# Altium PCB The-SIPM-(2).pcbdoc
Units mil, origin at the board's own origin, x right, y up, seen from the top; angles counter-clockwise.
Board outline 4760 x 4660 mil, 2 copper layers (Top Layer, Bottom Layer); 119 components, 59 nets, 365 pads, 107 vias.
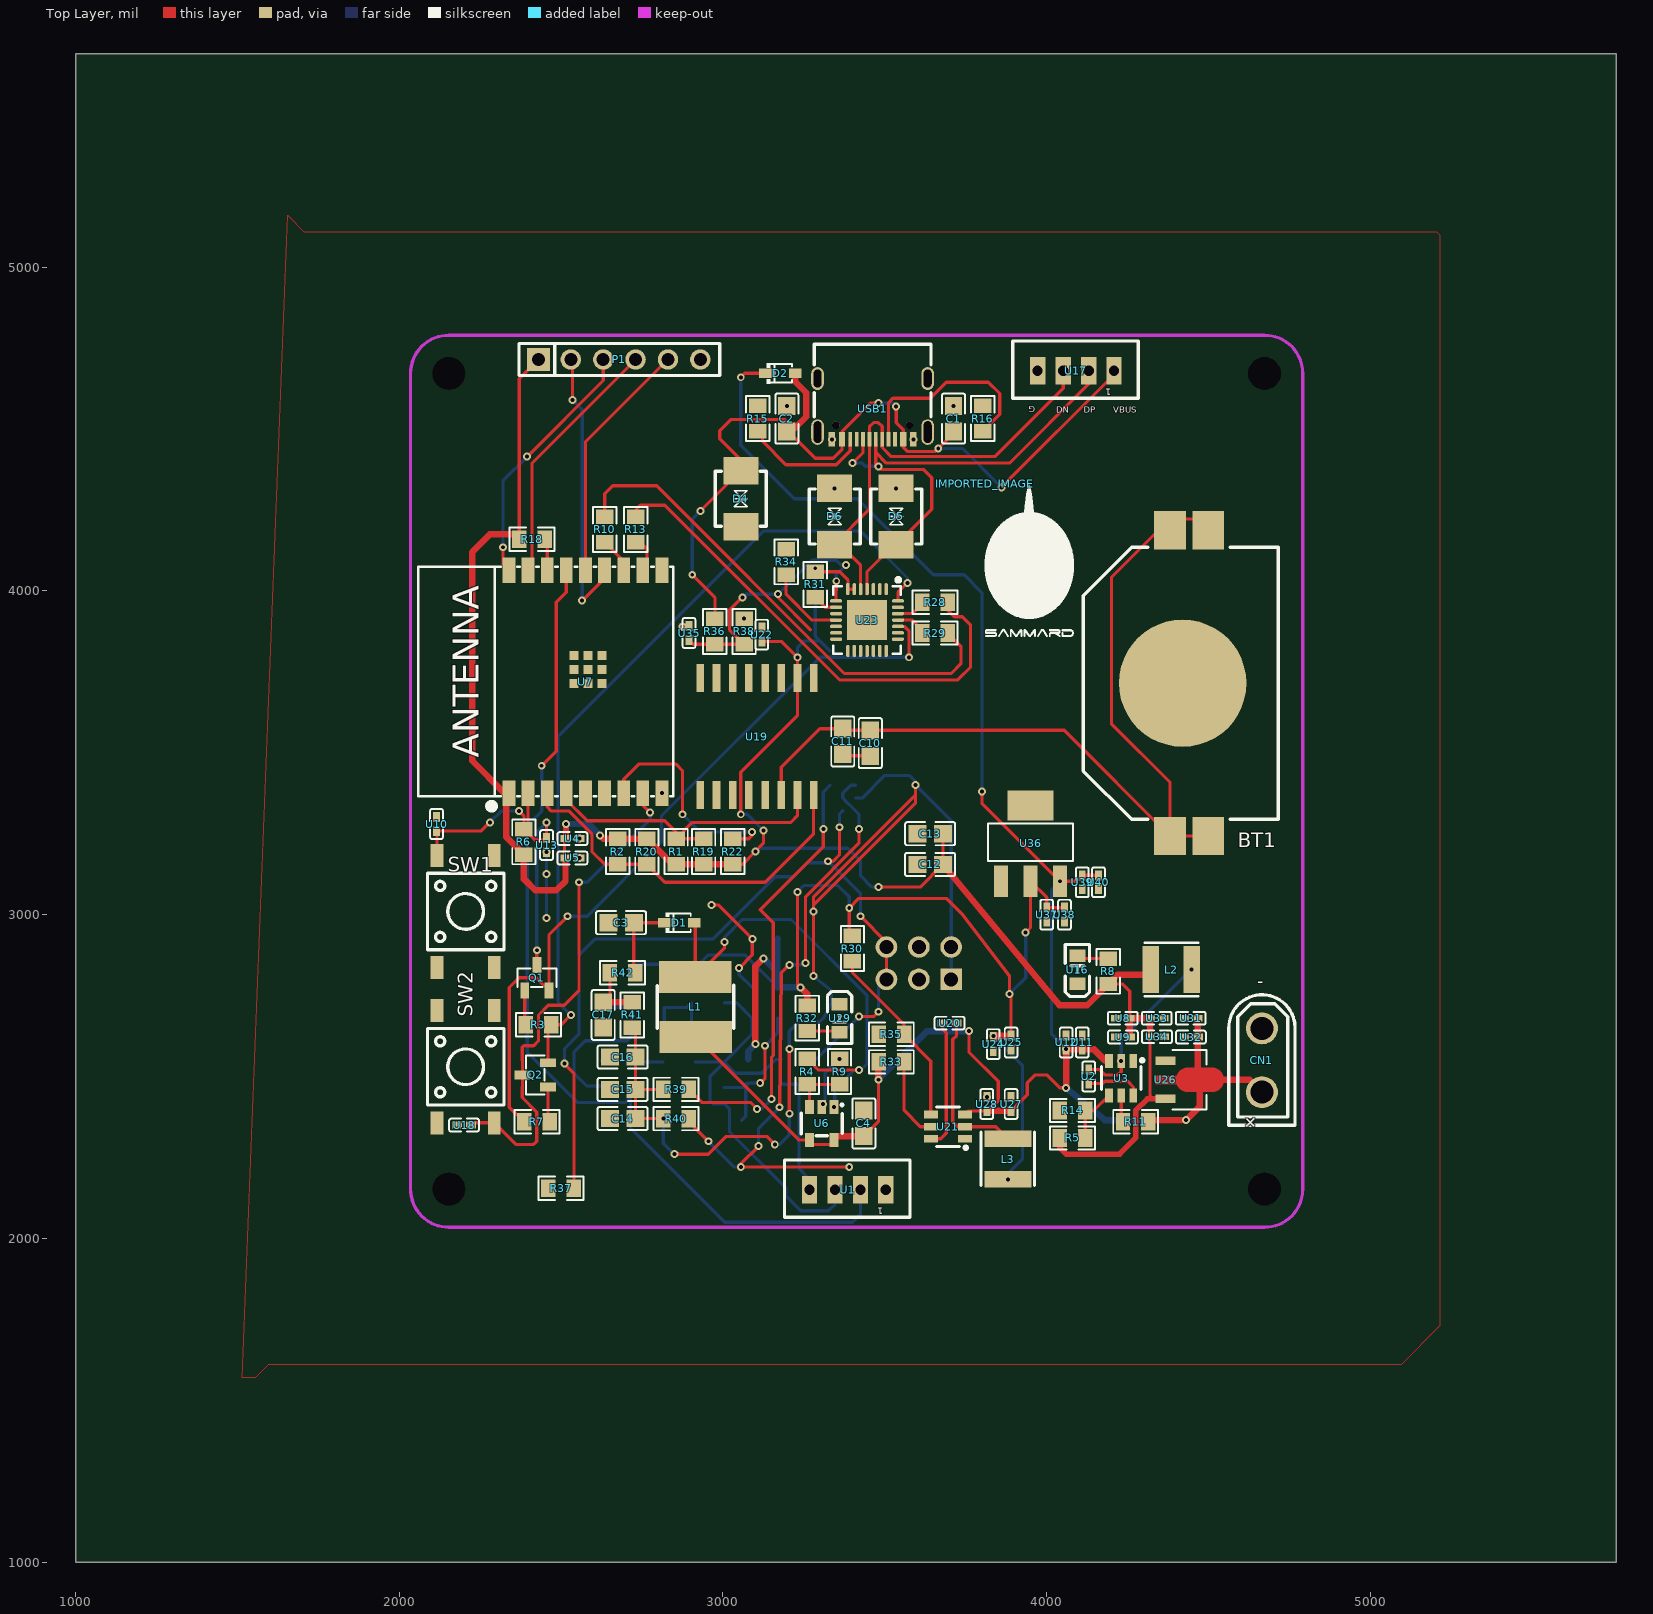
[diagram p0: Top Layer view]
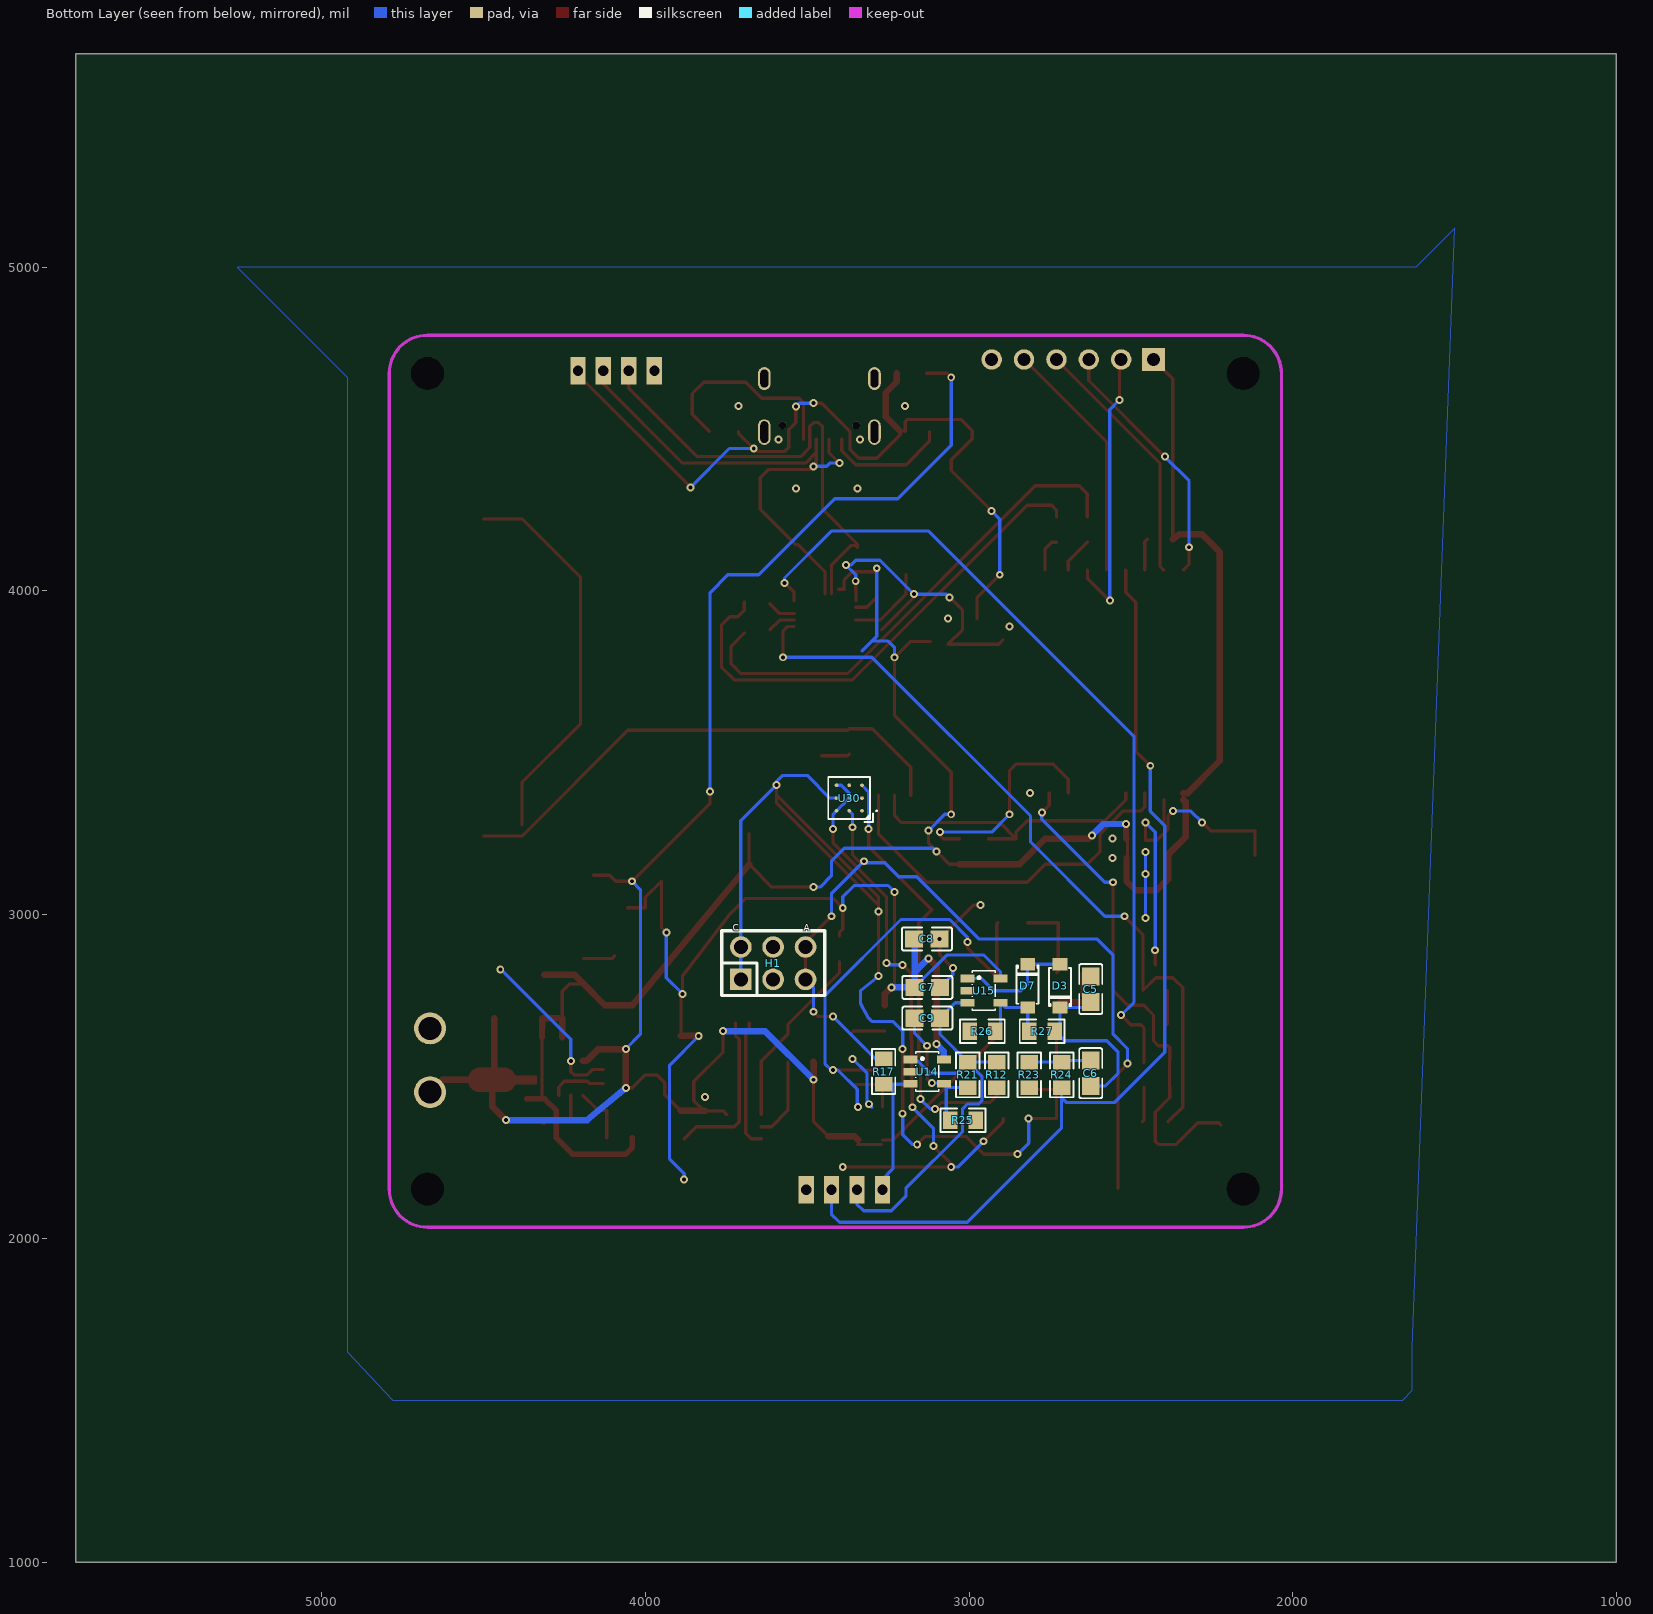
[diagram p1: Bottom Layer view, seen from below]

## Layer stack, top to bottom
Top Layer: signal copper (thickness not stored)
Dielectric: dielectric 12.6, FR-4, Dk 4.8
Bottom Layer: signal copper (thickness not stored)

## Board outline
5760,1000 1000,1000 1000,5660 5760,5660
cut-out: 2102.84,4671.89 cw(c2153.11,4672.16) 2203.39,4671.89 cw(c2153.11,4671.62) 2102.84,4671.89
cut-out: 2102.84,2152.21 cw(c2153.11,2152.48) 2203.39,2152.21 cw(c2153.11,2151.94) 2102.84,2152.21
cut-out: 4622.51,2152.21 cw(c4672.79,2152.48) 4723.06,2152.21 cw(c4672.79,2151.94) 4622.51,2152.21
cut-out: 4622.51,4671.89 cw(c4672.79,4672.16) 4723.06,4671.89 cw(c4672.79,4671.62) 4622.51,4671.89

## Components (designator, comment, footprint, x,y, rotation, side; value= is the part's Value field where it differs from the comment)
BT1 "CR2032" BAT-SMD_CR2032 4440,3715 r270 top
C1 "0.1uF" C0805#1 3712.25,4532.25 r90 top
C2 "10uF" C0805#1 3197.25,4532.25 r90 top
C3 "4.7uF" C0805#1 2685,2975 r180 top
C4 "2.2uF" C0805#1 3435,2355 r90 top
C5 "20nF" C0805#2 2623.89,2770.14 r270 bottom
C6 "20nF" C0805#2 2623.89,2510.14 r270 bottom
C7 "0.1uF" C0805#2 3128.89,2775.14 r0 bottom
C8 "10uF" C0805#2 3130,2925 r0 bottom
C9 "20nF" C0805#2 3128.89,2680.14 r0 bottom
C10 "0.1uF" C0805#1 3455,3530 r270 top
C11 "10uF" C0805#1 3370,3535 r270 top
C12 "0.1uF" C0805#1 3640,3155 r180 top
C13 "10uF" C0805#1 3640,3250 r180 top
C14 "0.1uF" C0805#1 2690,2370 r180 top
C15 "1uF" C0805#1 2690,2460 r180 top
C16 "10uF" C0805#1 2690,2560 r180 top
C17 "1uF" C0805#1 2630,2690 r270 top
CN1 "XT30UPB-M" CONN-TH_XT30UPB-M 4665,2550 r270 top
D1 "1N5819WS" SOD-323_L1.8-W1.3-LS2.5-RD 2865,2975 r0 top
D2 "LBAT54HT1G" SOD-323_L1.8-W1.3-LS2.5-RD 3177.25,4672.25 r0 top
D3 "1N5817W" SOD-123_L2.8-W1.8-LS3.7-RD 2718.89,2780.14 r270 bottom
D4 "SMBJ7.5CA-QH" DO-214AA_L4.4-W3.6-LS5.3-BI 3055,4285 r270 top
D5 "SMBJ7.5CA-QH" DO-214AA_L4.4-W3.6-LS5.3-BI 3535,4230 r90 top
D6 "SMBJ7.5CA-QH" DO-214AA_L4.4-W3.6-LS5.3-BI 3345,4230 r90 top
D7 "1N5817W" SOD-123_L2.8-W1.8-LS3.7-RD 2818.89,2780.14 r90 bottom
H1 "2×(4-1) Double female header" HDR-TH_6P-P2.54-V-F-R2-C3-S2.54-1 3605,2850 r0 bottom
IMPORTED_IMAGE "IMPORTED_IMAGE" IMPORTED_IMAGE 3808.43,4330.53 r0 top
L1 "10uH" IND-SMD_L6.0-W6.0_FNR60XXS 2915,2715 r270 top
L2 "2.2uH" IND-SMD_L4.0-W4.0_SMNR4012 4385,2830 r0 top
L3 "3.3uH" IND-SMD_L4.0-W4.0_SMNR4012 3880,2245 r90 top
P1 "SD card Reader" HDR-TH_6P-P2.54-V-F 2680,4715 r0 top
Q1 "L8050QLT1G" SOT-23-3_L2.9-W1.3-P1.90-LS2.4-BR 2425,2805 r270 top
Q2 "L8050QLT1G" SOT-23-3_L2.9-W1.3-P1.90-LS2.4-BR 2420,2505 r0 top
R1 "10k" R0805#1 2855,3195 r270 top
R2 "10k" R0805#1 2675,3195 r90 top
R3 "10K" R0805#1 2430,2660 r180 top
R4 "2k" R0805#1 3260,2515 r90 top
R5 "33.2k" R0805#1 4080,2310 r0 top
R6 "10K" R0805#1 2385,3225 r90 top
R7 "10K" R0805#1 2425,2360 r0 top
R8 "1k" R0805#1 4190,2825 r270 top
R9 "51k" R0805#1 3360,2515 r270 top
R10 "499" R0805#1 2635,4190 r90 top
R11 "10k" R0805#1 4275,2360 r0 top
R12 "0805" R0805#2 2913.89,2505.14 r90 bottom
R13 "499" R0805#1 2730,4190 r90 top
R14 "10k" R0805#1 4080,2395 r0 top
R15 "5.1k" R0805#1 3107.25,4532.25 r90 top
R16 "5.1k" R0805#1 3802.25,4532.25 r270 top
R17 "0805" R0805#2 3263.89,2515.14 r90 bottom
R18 "10k" R0805#1 2410,4160 r0 top
R19 "10K" R0805#1 2940,3195 r90 top
R20 "10K" R0805#1 2765,3195 r270 top
R21 "0805" R0805#2 3003.89,2505.14 r270 bottom
R22 "10k" R0805#1 3030,3195 r90 top
R23 "0805" R0805#2 2813.89,2505.14 r270 bottom
R24 "0805" R0805#2 2713.89,2505.14 r270 bottom
R25 "0805" R0805#2 3018.89,2365.14 r0 bottom
R26 "0805" R0805#2 2958.89,2640.14 r180 bottom
R27 "0805" R0805#2 2773.89,2640.14 r180 bottom
R28 "0Ω" R0805#1 3655,3965 r0 top
R29 "0Ω" R0805#1 3655,3870 r0 top
R30 "54.9k" R0805#1 3400,2895 r270 top
R31 "1k" R0805#1 3285,4020 r270 top
R32 "1k" R0805#1 3260,2680 r90 top
R33 "10k" R0805#1 3520,2545 r180 top
R34 "10k" R0805#1 3195,4090 r270 top
R35 "10k" R0805#1 3520,2630 r0 top
R36 "22.1K" R0805#1 2975,3875 r270 top
R37 "0805" R0805#1 2500,2155 r0 top
R38 "47.5K" R0805#1 3065,3875 r90 top
R39 "0Ω" R0805#1 2855,2460 r180 top
R40 "0Ω" R0805#1 2855,2370 r180 top
R41 "0805" R0805#1 2720,2690 r90 top
R42 "0805" R0805#1 2690,2820 r0 top
SW1 "SMD Tactile Switch6*6*6mm" SW-SMD_4P-L6.0-W6.0-P4.50-LS9.0_C23873 2205,3009.99 r270 top
SW2 "SMD Tactile Switch6*6*6mm" SW-SMD_4P-L6.0-W6.0-P4.50-LS9.0_C23873 2205,2529.99 r90 top
U1 "JST-PH_4-PIN_HEADER" JST_B4B-PH_HEADER 3385,2150 r0 top
U2 "0.1uF" C0402 4130,2500 r90 top
U3 "TPS563201DDCR" SOT-23-6_L2.9-W1.6-P0.95-LS2.8-BR 4230,2495 r90 top
U4 "10uF" C0402 2535,3235 r0 top
U5 "0.1uF" C0402 2535,3175 r0 top
U6 "MIC2288YD5-TR" TSOT-23-5_L2.9-W1.6-P0.95-LS2.8-BR 3305,2355 r90 top
U7 "ESP32-C3-WROOM-02-N4(4MB)" BULETM-SMD_ESPRESSIF_ESP32-C3-WROOM-02-N4-4MB 2575,3720 r90 top
U8 "22uF" C0402 4235,2680 r180 top
U9 "22uF" C0402 4235.59,2621.9 r180 top
U10 "0.1uF" C0402 2115,3280 r270 top
U11 "10uF" C0402 4110,2605 r90 top
U12 "1uF" C0402 4060,2605 r90 top
U13 "1uF" C0402 2455,3215 r270 top
U14 "OPA356AIDBVR" SOT-23-5_L3.0-W1.7-P0.95-LS2.8-BR 3128.89,2515.14 r180 bottom
U15 "OPA356AIDBVR" SOT-23-5_L3.0-W1.7-P0.95-LS2.8-BR 2953.89,2765.14 r180 bottom
U16 "0805 SF-RED" LED0805-RD_RED 4095,2830 r90 top
U17 "JST-PH_4-PIN_HEADER" JST_B4B-PH_HEADER 4090,4680 r0 top
U18 "0.1uF" C0402 2200,2350 r0 top
U19 "DS3231" SO16W 3105,3550 r180 top
U20 "0.1uF" C0402 3700,2665 r0 top
U21 "TPS563201DDCR" SOT-23-6_L2.9-W1.6-P0.95-LS2.8-BR 3695,2345 r0 top
U22 "10uF" C0402 3120,3865 r90 top
U23 "CP2102" QFN-28_L5.0-W5.0-P0.50-TL-EP3.2 3445,3910 r270 top
U24 "22uF" C0402 3835,2600 r270 top
U25 "22uF" C0402 3890,2605 r270 top
U26 "HT7833" SOT-89_L4.5-W2.5-P1.50-LS4.2-BR 4420,2490 r180 top
U27 "0.1uF" C0402 3890,2415 r90 top
U28 "10uF" C0402 3815,2415 r90 top
U29 "0805 SF-RED" LED0805-RD_RED 3360,2680 r270 top
U30 "Sipm2" SIPM_REVERSE 3370,3360 r270 bottom
U31 "10uF" C0402 4445,2680 r180 top
U32 "0.1uF" C0402 4445.59,2621.9 r180 top
U33 "10uF" C0402 4340,2680 r0 top
U34 "0.1uF" C0402 4340.59,2622.67 r0 top
U35 "1uF" C0402 2895,3870 r90 top
U36 "AMS117-5V" AMS117-TOPL 3950,3220 r90 top
U37 "0.1uF" C0402 4000,3000 r270 top
U38 "10uF" C0402 4055,3000 r270 top
U39 "10uF" C0402 4110,3100 r270 top
U40 "0.1uF" C0402 4160,3100 r270 top
USB1 "HX TYPE-C 16P 3MD 5A" TYPE-C-SMD_HX-TYPE-C-16P-3MD-5A 3462.25,4562.25 r180 top

## Footprints (in the part's own frame and the unit in brackets; to place one, negate y for a bottom-side part, rotate by r counter-clockwise, add the part's x,y. Pads: shape width x height; smd on the part's side, far side on the other; paste and mask are expansions set on the pad)
AMS117-TOPL [mm]
  rect 2.5x1.1 smd paste+0 mask+0.051: 1(-2.97,2.3) 2(-2.97,0) 3(-2.97,-2.3)
  rect 2.34x3.6 smd paste+0 mask+0.051: 4(2.97,0)
  silkscreen extent -1.37,-3.33 1.57,3.33
BAT-SMD_CR2032 [mm]
  round 10 smd paste-100 mask+0.05: 1(0,-0.508)
  rect 3x2.5 smd paste-100 mask+0.05: 2(-12,-1.5) 2(-12,1.5) 2(12,-1.5) 2(12,1.5)
  silkscreen extent -10.68,-8.3 10.68,7
BULETM-SMD_ESPRESSIF_ESP32-C3-WROOM-02-N4-4MB [mm]
  rect 2x1 smd paste+0 mask+0.05: 1(-8.75,6) 2(-8.75,4.5) 3(-8.75,3) 4(-8.75,1.5) 5(-8.75,0) 6(-8.75,-1.5) 7(-8.75,-3) 8(-8.75,-4.5) 9(-8.75,-6) 10(8.75,-6) 11(8.75,-4.5) 12(8.75,-3) 13(8.75,-1.5) 14(8.75,0) 15(8.75,1.5) 16(8.75,3) 17(8.75,4.5) 18(8.75,6)
  rect 0.7x0.7 smd paste+0 mask+0.05: 19(-0.14,0.9) 19(-0.14,-0.2) 19(-0.14,-1.3) 19(0.96,-1.3) 19(0.96,-0.2) 19(0.96,0.9) 19(2.06,-1.3) 19(2.06,-0.2) 19(2.06,0.9)
  silkscreen extent -10.03,-6.9 9,13.1
C0402 [mm]
  rect 0.79x0.54 smd paste-100 mask+0.051: 1(-0.545,0) 2(0.545,0)
  silkscreen extent -1.17,-0.5 1.17,0.5
C0805#1 [mm]
  rect 1.41x1.35 smd paste-100 mask+0.051: 1(-1,0) 2(1,0)
  silkscreen extent -1.96,-0.9 1.96,0.9
C0805#2 [mm]
  rect 1.41x1.35 smd paste-100 mask+0.051: 1(1,0) 2(-1,0)
  silkscreen extent -1.96,-0.9 1.96,0.9
CONN-TH_XT30UPB-M [mm]
  round 2.5 hole 1.8 paste+0 mask+0.051: 1(-2.5,0) 2(2.5,0)
  silkscreen extent -5.14,-2.6 5.1,2.6
DO-214AA_L4.4-W3.6-LS5.3-BI [mil]
  rect 85x108 smd paste+0 mask+2: 1(-87,0) 2(87,0)
  silkscreen extent -85,-79 85,79
HDR-TH_6P-P2.54-V-F [mm]
  rect 1.8x1.8 hole 1.02 paste+0 mask+0.051: 1(-6.35,0)
  round 1.6 hole 1.02 paste+0 mask+0.051: 2(-3.81,0) 3(-1.27,0) 4(1.27,0) 5(3.81,0) 6(6.35,0)
  silkscreen extent -7.87,-1.25 7.87,1.25
HDR-TH_6P-P2.54-V-F-R2-C3-S2.54-1 [mm]
  rect 1.7x1.7 hole 1.1 paste+0 mask+0.051: 1(2.54,1.27)
  round 1.7 hole 1.1 paste+0 mask+0.051: 2(2.54,-1.27) 3(0,1.27) 4(0,-1.27) 5(-2.54,1.27) 6(-2.54,-1.27)
  silkscreen extent -4.04,-2.54 4.04,2.54
IMPORTED_IMAGE [mil]
  silkscreen extent 0,-472 276,0
IND-SMD_L4.0-W4.0_SMNR4012 [mm]
  rect 1.3x3.7 smd paste+0 mask+0.051: 1(-1.6,0) 2(1.6,0)
  silkscreen extent -2.08,-2.09 2.12,2.11
IND-SMD_L6.0-W6.0_FNR60XXS [mm]
  rect 2.5x5.7 smd paste+0 mask+0.051: 1(-2.35,-0.013) 2(2.35,0.013)
  silkscreen extent -1.69,-3 1.69,3
JST_B4B-PH_HEADER [mil]
  rect 47.2x85 hole 31.4 paste+0 mask+2: P1(118,0) P2(40,0) P3(-39,0) P4(-118,0)
  silkscreen extent -195,-85 193,92
LED0805-RD_RED [mm]
  rect 1x1.25 smd paste+0 mask+0.051: 1(-1.1,0) 2(1.1,0)
  silkscreen extent -2.1,-0.95 1.98,0.96
QFN-28_L5.0-W5.0-P0.50-TL-EP3.2 [mm]
  oval 0.95x0.28 smd paste-100 mask+0.051: 1(-2.425,1.501) 2(-2.425,1.001) 3(-2.425,0.501) 4(-2.425,0) 5(-2.425,-0.5) 6(-2.425,-1.001) 7(-2.425,-1.501) 15(2.425,-1.501) 16(2.425,-1.001) 17(2.425,-0.5) 18(2.425,0) 19(2.425,0.501) 20(2.425,1.001) 21(2.425,1.501)
  oval 0.28x0.95 smd paste-100 mask+0.051: 8(-1.501,-2.425) 9(-1.001,-2.425) 10(-0.501,-2.425) 11(0,-2.425) 12(0.5,-2.425) 13(1.001,-2.425) 14(1.501,-2.425) 22(1.501,2.425) 23(1.001,2.425) 24(0.5,2.425) 25(0,2.425) 26(-0.501,2.425) 27(-1.001,2.425) 28(-1.501,2.425)
  rect 3.15x3.15 smd paste-100 mask+0.051: 29(0,0)
  silkscreen extent -3.3,-2.65 2.65,2.65
R0805#1 [mil]
  rect 44.59x54.21 smd paste-3937.01 mask+2: 1(-39.37,0) 2(39.37,0)
  silkscreen extent -69,-36 69,36
R0805#2 [mil]
  rect 44.59x54.21 smd paste-3937.01 mask+2: 1(39.37,0) 2(-39.37,0)
  silkscreen extent -69,-36 69,36
SIPM_REVERSE [mm]
  round 0.288 smd paste-100 mask+0.051: A1(-1,0) A2(1,0) C1(0,-1) C2(0,1) R1(-1,1) R2(1,1) ""(-1,-1) ""(0,0) ""(1,-1)
  silkscreen extent -1.65,-1.65 1.87,2.2
SO16W [mil]
  rect 23.6x86.6 smd paste+0 mask+2: 1(-175,-181) 2(-125,-181) 3(-75,-181) 4(-25,-181) 5(25,-181) 6(75,-181) 7(125,-181) 8(175,-181) 9(175,181) 10(125,181) 11(75,181) 12(25,181) 13(-25,181) 14(-75,181) 15(-125,181) 16(-175,181)
SOD-123_L2.8-W1.8-LS3.7-RD [mm]
  rect 0.95x1.15 smd paste+0 mask+0.051: 1(1.693,0) 2(-1.693,0)
  silkscreen extent -1.41,-0.87 1.58,0.87
SOD-323_L1.8-W1.3-LS2.5-RD [mm]
  rect 1x0.75 smd paste+0 mask+0.051: 1(-1.173,0) 2(1.173,0)
  silkscreen extent -1.08,-0.8 0.9,0.8
SOT-23-3_L2.9-W1.3-P1.90-LS2.4-BR [mm]
  rect 1.25x0.7 smd paste+0 mask+0.051: 1(1,-0.95) 2(1,0.95) 3(-1,0)
  silkscreen extent -0.73,-1.53 0.73,1.53
SOT-23-5_L3.0-W1.7-P0.95-LS2.8-BR [mm]
  rect 1.1x0.6 smd paste+0 mask+0.051: 1(-1.3,0.95) 2(-1.3,0) 3(-1.3,-0.95) 4(1.3,-0.95) 5(1.3,0.95)
  silkscreen extent -0.9,-1.55 0.9,1.55
SOT-23-6_L2.9-W1.6-P0.95-LS2.8-BR [mm]
  rect 1.1x0.6 smd paste+0 mask+0.051: 1(1.35,-0.95) 2(1.35,0) 3(1.35,0.95) 4(-1.35,0.95) 5(-1.35,0) 6(-1.35,-0.95)
  silkscreen extent -0.9,-1.78 1.52,1.55
SOT-89_L4.5-W2.5-P1.50-LS4.2-BR [mm]
  rect 1.575x0.672 smd paste+0 mask+0.051: 1(1.356,-1.5) 3(1.356,1.5)
  Top Layer region: -2.283,0.959 -0.429,0.959 -0.385,0.958 -0.34,0.955 -0.296,0.949 -0.252,0.942 -0.208,0.933 -0.165,0.921 -0.123,0.908 -0.081,0.893 -0.04,0.875 0,0.856 0.04,0.835 0.078,0.812 0.115,0.788 0.151,0.761 0.185,0.733 0.219,0.704 0.251,0.673 0.281,0.64 0.31,0.606 0.337,0.571 0.362,0.534 0.386,0.497 0.408,0.458 0.428,0.418 0.447,0.339 2.144,0.339 2.144,-0.321 0.447,-0.321 0.428,-0.401 0.408,-0.44 0.386,-0.479 0.362,-0.517 0.337,-0.553 0.31,-0.588 0.281,-0.622 0.251,-0.655 0.219,-0.686 0.185,-0.716 0.151,-0.744 0.115,-0.77 0.078,-0.795 0.04,-0.818 0,-0.839 -0.04,-0.858 -0.081,-0.875 -0.123,-0.89 -0.165,-0.904 -0.208,-0.915 -0.252,-0.925 -0.296,-0.932 -0.34,-0.937 -0.385,-0.94 -0.429,-0.941 -2.283,-0.941 -2.328,-0.94 -2.372,-0.937 -2.416,-0.932 -2.46,-0.925 -2.504,-0.915 -2.547,-0.904 -2.589,-0.89 -2.631,-0.875 -2.672,-0.858 -2.713,-0.839 -2.752,-0.818 -2.79,-0.795 -2.827,-0.77 -2.863,-0.744 -2.898,-0.716 -2.931,-0.686 -2.963,-0.655 -2.993,-0.622 -3.022,-0.588 -3.049,-0.553 -3.075,-0.517 -3.098,-0.479 -3.12,-0.44 -3.141,-0.401 -3.159,-0.36 -3.175,-0.318 -3.189,-0.276 -3.202,-0.233 -3.212,-0.19 -3.22,-0.146 -3.227,-0.102 -3.231,-0.058 -3.233,-0.013 -3.233,0.031 -3.231,0.076 -3.227,0.12 -3.22,0.164 -3.212,0.208 -3.202,0.251 -3.189,0.294 -3.175,0.336 -3.159,0.377 -3.141,0.418 -3.12,0.458 -3.098,0.497 -3.075,0.534 -3.049,0.571 -3.022,0.606 -2.993,0.64 -2.963,0.673 -2.931,0.704 -2.898,0.733 -2.863,0.761 -2.827,0.788 -2.79,0.812 -2.752,0.835 -2.713,0.856 -2.672,0.875 -2.631,0.893 -2.589,0.908 -2.547,0.921 -2.504,0.933 -2.46,0.942 -2.416,0.949 -2.372,0.955 -2.328,0.958
  silkscreen extent -1.87,-2.33 0.78,2.33
SW-SMD_4P-L6.0-W6.0-P4.50-LS9.0_C23873 [mm]
  rect 1.8x1 smd paste+0 mask+0.051: 1(-4.4,2.25) 2(4.4,2.25) 3(4.4,-2.25) 4(-4.4,-2.25)
  silkscreen extent -3,-3 3,3
TSOT-23-5_L2.9-W1.6-P0.95-LS2.8-BR [mm]
  rect 1.1x0.7 smd paste+0 mask+0.051: 1(1.294,-0.951) 2(1.294,-0.001) 3(1.294,0.951) 4(-1.294,0.951) 5(-1.294,-0.949)
  silkscreen extent -0.97,-1.65 1.52,1.61
TYPE-C-SMD_HX-TYPE-C-16P-3MD-5A [mm]
  oval 1x1.8 hole 0.6 slot 1.4 at 90 deg paste+0 mask+0.051: 1(-4.32,-2.384) 1(4.32,-2.384)
  oval 1x2 hole 0.6 slot 1.7 at 90 deg paste+0 mask+0.051: 1(-4.32,1.816) 1(4.32,1.816)
  rect 0.5x1.14 smd paste-100 mask+0.051: A1(-3.2,2.383) A4(-2.4,2.383) A9(2.4,2.383) A12(3.2,2.383)
  rect 0.3x1.14 smd paste-100 mask+0.051: A5(-1.25,2.383) A6(-0.25,2.383) A7(0.25,2.383) A8(1.25,2.384) B5(1.75,2.383) B6(0.75,2.383) B7(-0.75,2.383) B8(-1.75,2.384)
  round 0.6 hole 0.6 unplated paste+0: ""(-2.89,1.296) ""(2.89,1.296)
  silkscreen extent -4.57,-5.08 4.57,0.63

## Via types
v1: diameter 24.41, hole 12.2, Top Layer to Bottom Layer, tented both sides, 107 vias

## Nets (pads, with @x,y where several pads share a name; then routed paths per layer and width w, separated by ;. In a path a pad name is that pad's centre, name@x,y a point inside that pad or via, vN(x,y) a via of type N, cw(c..) or ccw(c..) an arc to the next point about the centre after c; other vN are vias at no path point)
3V3: C12.1 C13.1 L2.1 P1.1 R1.2 R2.2 R5.1 R6.1 R8.2 R18.1 R19.1 R20.1 R22.1 R31.1 U4.1 U5.1 U7.1 U8.1 U9.1 U19.2 U22.1 U23.6 U23.7 U26.3 U33.1 U34.1 | length 6960.6
  Top Layer w10: R18.1 2370.63,4655.63 P1.1 ; U5.1@2510,3180 U4.1@2510,3240 ; R22.1 3060.63,3155.63 v1(3100,3195) 3125,3220 v1(3125,3260) ; v1(3055,3310) 3055,3380 3055,3440 3230,3615 U19.2 v1(3230,3795) 3181.46,3843.54 U22.1 ; R31.1 3360.6,4059.4 3385.9,4034.1 U23.7 ; U23.7@3385,4005 U23.6@3402.8,4005 ; v1(3480,3085) 3609.38,3085 C12.1 ; C12.1 C13.1 ; R8.2 4235,2785 4256.5,2763.5 U8.1 ; U34.1 4319.1,2440.9 4329.1,2430.9 U26.3
  Top Layer w17: R5.1 4040.63,2279.37 4060,2260 4225,2260 4275,2310 4275,2395 4310.94,2430.94 U26.3
  Top Layer w20: U7.1@2338.78,3355.51 2330,3346.73 2330,3240.63 R6.1 ; U7.1 2324.5,3375.5 2225,3475 2225,4120 2280,4175 2350,4175 R18.1 ; R6.1 2385,3110 2420,3075 2485,3075 2513.5,3103.5 U5.1 ; U4.1 2515,3236.46 v1(2515,3280) ; v1(2620,3245) 2630.63,3234.37 R2.2 R20.1 2843.74,3155.63 R1.2 R19.1 R22.1 ; C12.1 4039.4,2720 4125,2720 R8.2 ; R8.2 4219.37,2815 L2.1@4311.9,2815 ; U9.1@4257.05,2621.9 U8.1 U33.1 U34.1
  Bottom Layer w10: v1(3055,3310) 3075,3310 v1(3125,3260) ; v1(3100,3195) 3110,3205 3385,3205 3425,3165 3425,3120 3460,3085 v1(3480,3085) ; v1(3230,3795) 3230,3825 3250,3845 3300,3845 3330,3815 3285,3860 v1(3285,4070)
  Bottom Layer w20: v1(2515,3280) 2585,3280 v1(2620,3245)
5V: C7.1 C8.1 L3.1 R30.1 R32.2 U14.5 U15.5 U24.1 U25.1 U36.2 U37.1 U38.1 | length 3580.2
  Top Layer w10: v1(3230,3070) 3230,2785.14 v1(3240,2775.14) ; R30.1 3400,2945 3390,2955 v1(3390,3020) 3420,3050 3690,3050 3738.8,3001.2 3885,2810 v1(3885,2755) 3890,2750 U25.1 ; v1(3935,2945) 3950,2960 U36.2 4000,3053.07 U37.1 U38.1
  Top Layer w20: v1(3100,2600) 3100,2840 v1(3125,2865) ; v1(3240,2775.14) 3260,2755.14 R32.2 ; U24.1 v1(3835,2625) 3836.46,2626.46 U25.1
  Bottom Layer w10: U15.5 2902.7,2824 2953.7,2875 3068.4,2875 C7.1 ; v1(3230,3070) 3250,3090 3355,3090 3390,3055 v1(3390,3020) ; v1(3835,2625) 3925,2535 3925,2245 3880,2200 v1(3880,2182.01) ; v1(3885,2755) 3935,2805 v1(3935,2945)
  Bottom Layer w20: U14.5 3077.71,2577.71 v1(3100,2600) ; v1(3125,2865) 3168.27,2821.73 C7.1 ; C8.1 3168.26,2923.89 C7.1 ; v1(3240,2775.14) C7.1
33V: C3.1 D1.1 R42.2 | length 251.5
  Top Layer w10: R42.2 2724.37,2825 C3.1 D1.1
C6_2: C6.2 R23.2 R24.2 | length 192.1
  Bottom Layer w10: C6.2 2708.89,2549.51 R24.2 R23.2
CHIP_PU: Q1.3 R6.2 SW1.4 U7.2 U10.2 U13.1 | length 1117
  Top Layer w10: SW1.4 2116.41,3257.12 U10.2 2253.54,3258.54 v1(2280,3285) ; v1(2370,3320) 2385,3305 R6.2 2397.83,3277.2 U7.2@2397.83,3355.51 ; R6.2 2419.4,3230 2455,3230 U13.1@2455,3246.5 ; Q1.3 v1(2425,2890) ; U13.1 v1(2455,3285)
  Bottom Layer w10: v1(2280,3285) 2315,3320 v1(2370,3320) ; v1(2425,2890) 2425,3255 v1(2455,3285)
CLK: P1.4 U7.17 | length 788.1
  Top Layer w10: U7.17 2410,4076.7 2410,4395 P1.4
CS: P1.2 U7.13 | length 882.6
  Top Layer w10: P1.2 2535,4710 v1(2535,4590) ; v1(2565,3970) 2634.05,4039.05 U7.13@2634.05,4064.49
  Bottom Layer w10: v1(2535,4590) 2565,4560 v1(2565,3970)
D3_1: C5.1 C6.1 D3.1 R27.1 | length 569.9
  Bottom Layer w10: C6.1 2578.3,2470.8 2540,2509 2540,2576.2 2573.9,2610.1 2704.5,2610.1 R27.1 ; C5.1 2641.16,2713.51 D3.1 2718.89,2655.77 R27.1
DTR: Q2.2 R3.1 U23.28 | length 2557.6
  Top Layer w10: Q2.2 2459.37,2650 R3.1 2500,2660 v1(2530,2690) ; U23.28 3540.47,3995.47 v1(3570,4025)
  Bottom Layer w10: v1(2530,2690) 2490,2730 2490,3550 3125,4185 3425,4185 3570,4040 v1(3570,4025)
GND: BT1.1 C1.2 C2.2 C3.2 C4.2 C5.2 C7.2 C8.2 C10.2 C11.2 C12.2 C13.2 C14.2 C15.2 C16.2 C17.2 CN1.1 D4.2 D5.2 D6.2 H1.3 H1.4 P1.6 R9.1 R12.2 R14.1 R15.2 R16.1 R23.1 R25.2 R26.2 R34.1 R35.1 R37.1 R38.2 SW1.1 SW2.1 U1.P1 U3.1 U4.2 U5.2 U6.2 U7.9 U7.19 U8.2 U9.2 U10.1 U11.2 U12.2 U13.2 U14.2 U15.2 U16.1 U17.P4 U18.1 U19.13 U21.1 U22.2 U23.3 U24.2 U25.2 U26.1 U27.2 U28.2 U29.1 U31.2 U32.2 U33.2 U34.2 U35.2 U36.1 U37.2 U38.2 U39.2 U40.2 USB1.A1 USB1.A12 | length 817
  Top Layer w10: v1(2965,3030) 2985.63,3030 v1(3090.63,2925) 3090.63,2875.63 v1(3050,2835) ; C11.2 3375,3490.63 C10.2
  Bottom Layer w10: v1(2455,2990) v1(2455,3125) v1(2455,3193.54) ; v1(3050,2835) 3050,2814.66 C7.2 ; 3300,2405 v1(3309.34,2414.34) 3315,2420 3315,2509.4 v1(3360,2554.37)
  other v1: 3815,2436.46 2556.46,3175 2556.46,3235 2811.22,3375.51 2875,3890 3065,3914.37 3345,4317 3535,4317 3336.27,4468.42 3588.24,4468.42 3197.25,4571.62 3712.25,4571.62
GPIO2: R18.2 U7.16 | length 98.6
  Top Layer w10: R18.2 2456.89,4152.48 U7.16
GPIO8: R22.2 U7.7 | length 699.4
  Top Layer w10: U7.7 2693.11,3418.11 2740,3465 2855,3465 2875,3445 v1(2875,3310) ; R22.2 3079.4,3234.4 3090,3245 v1(3090,3255)
  Bottom Layer w10: v1(2875,3310) 2930,3255 v1(3090,3255)
GPIO9: Q2.3 SW2.4 U7.8 U18.2 | length 1566.9
  Top Layer w10: U18.2 2228.23,2356.77 SW2.4 2360.36,2290 2415,2290 2425,2300 2425,2390 2380,2435 Q2.3 2380,2590 2385,2595 2415,2595 2430,2610 2430,2690 2460,2720 2510,2720 2555,2765 v1(2555,3100) ; U7.8 2752.16,3337.84 v1(2775,3315)
  Bottom Layer w10: v1(2555,3100) 2580,3100 2775,3295 v1(2775,3315)
IN: R24.1 U1.P2 U7.15 | length 3002.1
  Top Layer w10: v1(2440,3460) 2485,3505 2485,3965 2515.94,3995.94 U7.15
  Bottom Layer w10: v1(2440,3460) 2440,3320 2395,3275 2395,2575 2550,2420 2700,2420 2713.9,2433.9 R24.1 2713.9,2341.1 3005,2050 3400,2050 3425,2075 U1.P2
MISO: P1.5 U7.14 | length 756.1
  Top Layer w10: U7.14 2575,4460 P1.5
MOSI: P1.3 U7.18 | length 786.7
  Top Layer w10: v1(2320,4135) 2320,4083.27 U7.18 ; v1(2395,4415) 2630,4650 P1.3
  Bottom Layer w10: v1(2320,4135) 2320,4340 v1(2395,4415)
Q1_1: Q1.1 R3.2 | length 106.9
  Top Layer w10: Q1.1 2387.6,2663.03 R3.2
Q2_1: Q2.1 R7.2 | length 109.7
  Top Layer w10: Q2.1 2459.37,2365 R7.2
R1: R39.1 U30.R1 | length 1370.2
  Top Layer w10: R39.1 2934.4,2420 3085,2420 v1(3105,2400) ; v1(3150,2430) 3150,2560 3155,2565 3155,2975 3115,3015 3310,3210 v1(3310,3265)
  Bottom Layer w10: v1(3105,2400) 3120,2400 v1(3150,2430) ; v1(3310,3265) 3310,3378.74 U30.R1
R3: R40.1 U30. | length 1956.9
  Top Layer w10: R40.1 2894.37,2360.63 v1(2955,2300) ; v1(3110,2285) 3055,2230 v1(3055,2220) v1(3390,2220) ; v1(3175,2405) 3180,2820 v1(3205,2845) ; v1(3255,2850) 3255,3055 3420,3220 v1(3420,3265)
  Bottom Layer w10: v1(2955,2300) 3035,2220 v1(3055,2220) ; v1(3110,2285) 3110,2340 v1(3175,2405) ; v1(3205,2845) 3250,2845 v1(3255,2850) ; U30.@3370,3360 3370,3375 3394.4,3399.4 U30.@3409.4,3399.4 ; 3375,3355 3409.37,3320.63 3420,3310 v1(3420,3265)
R8_1: R8.1 U16.2 | length 98.7
  Top Layer w10: U16.2 4103.94,2864.37 R8.1
R30_2: R30.2 R35.2 U21.4 | length 573.4
  Top Layer w10: R30.2 3400,2820 3559.4,2660.6 R35.2 ; R35.2 3641.85,2547.52 U21.4
R32_1: R32.1 U29.2 | length 101.6
  Top Layer w10: R32.1 3356.06,2640.63 U29.2
R33_1: R33.1 U21.5 | length 252.9
  Top Layer w10: R33.1 3559.4,2395.6 3610,2345 U21.5@3641.9,2345
R41_2: C17.1 R41.2 R42.1 | length 189.2
  Top Layer w10: C17.1 2650.63,2750 R42.1
  Top Layer w20: C17.1 R41.2
RTS: Q1.2 R7.1 U23.24 | length 2392.4
  Top Layer w10: R7.1 2340,2405.63 2340,2775 2370,2805 2423.03,2805 Q1.2 2462.4,2937.4 v1(2520,2995) ; U23.24 3559.7,3890.3 3575,3875 v1(3575,3795)
  Bottom Layer w10: v1(2520,2995) 2580,2995 2810,3225 2810,3305 3300,3795 v1(3575,3795)
RX_UB: R13.2 R28.2 | length 1561.3
  Top Layer w10: R13.2@2730,4245 R13.2 2730,4250 2745,4265 2820,4265 3360,3725 3725,3725 3765,3765 3765,3894.4 3739.4,3920 3715,3920 3694.37,3940.63 R28.2
SCL: R2.1 R20.2 U7.3 U19.16 | length 1175.4
  Top Layer w10: U7.3 2456.9,3333.1 2470,3320 2525,3320 2595,3250 2595,3195 2634.4,3155.6 R2.1 ; R2.1 R20.2 ; R20.2 2820.6,3100 3130,3100 3280,3250 U19.16
SDA: R1.1 R19.2 U7.4 U19.15 | length 975.4
  Top Layer w10: U7.4 2515.9,3354.1 2580,3290 2820,3290 2855,3255 R1.1 2905.6,3285 3210,3285 3230,3305 U19.15 ; R1.1 R19.2
SIPM_A: H1.5 H1.6 R17.1 R37.2 U30.A2 | length 2653.2
  Top Layer w10: v1(2510,2540) 2539.37,2510.63 R37.2 ; v1(3325,3165) 3340,3165 3360,3185 v1(3360,3270) ; v1(3420,2685) 3465,2685 v1(3480,2700) ; v1(3425,2995) 3505,2915 H1.6 H1.5
  Bottom Layer w10: v1(2510,2540) 2510,2585 2555,2630 2555,2875 2605,2925 2970,2925 3161.7,3116.7 3216.7,3116.7 3260,3160 3325,3160 v1(3325,3165) 3425,3065 v1(3425,2995) ; R17.1 3289.52,2554.52 v1(3420,2685) ; v1(3360,3270) 3360,3310.63 U30.A2 ; v1(3480,2700) 3480,2775 H1.5
SIPM_C: C14.1 C15.1 C16.1 H1.1 H1.2 R39.2 R40.2 R41.1 U30.C1 | length 3705.4
  Top Layer w10: R41.1 2729.37,2641.26 C16.1 C15.1 ; v1(2815.63,2370) C14.1 C15.1 ; R39.2 C15.1 ; v1(2850,2260) 2955,2260 3010,2315 3135,2315 v1(3160,2290) ; v1(3205,2385) v1(3205,2585) ; v1(3280,2810) v1(3280,3010) ; v1(3280,3010) 3280,3030 3595,3345 v1(3595,3400) 3595,3370 3280,3055 v1(3280,3010)
  Bottom Layer w10: v1(2815.63,2370) 2815.63,2294.37 v1(2850,2260) ; v1(3160,2290) 3175,2290 3205,2320 v1(3205,2385) ; v1(3205,2585) 3205,2640 3235,2670 3300,2670 3310,2680 3335,2725 3335,2765 v1(3280,2810) ; U30.C1 3430,3360 3500,3430 3575,3430 3595,3410 v1(3595,3400) 3705,3290 H1.1
SW1: L2.2 U2.2 U3.2 | length 518
  Top Layer w10: U2.2 4163.54,2521.46 4180,2505 4220,2505 4230,2515 U3.2@4230,2548.15
  Bottom Layer w10: v1@4230,2548.15 4230,2615 4445,2830 v1(4447.99,2830)
  other v1: 4230,2548.15
SW2: L3.2 U20.2 U21.2 | length 501.3
  Top Layer w10: U20.2 3721.5,2626.5 3710,2615 3710,2360 3725,2345 U21.2@3748.1,2345 ; U21.2 3842.99,2345 L3.2
TX_UB: R10.2 R29.2 | length 1545.4
  Top Layer w10: R10.2 2635,4300 2660,4325 2795,4325 3375,3745 3705,3745 3735,3775 3735,3829.4 R29.2
U3_4: R5.2 R14.2 U3.4 | length 177.6
  Top Layer w10: R5.2 R14.2 4145.75,2395 U3.4@4192.6,2441.85
U3_5: R11.1 U3.5 | length 84.2
  Top Layer w10: U3.5@4230,2441.85 4230,2365.63 R11.1
U3_6: U2.1 U3.6 | length 173
  Top Layer w10: U2.1 4173.54,2478.54 4180,2485 4250,2485 4267.4,2467.6 U3.6@4267.4,2441.85
U6_1: D1.2 L1.1 R4.2 U6.1 | length 1461.5
  Top Layer w10: D1.2 2914.5,2971.66 L1.1 3005,2898.02 v1(3005,2915) ; R4.2 3294.4,2520 v1(3420,2520)
  Bottom Layer w10: v1(3005,2915) 3005,2930 3060,2985 3210,2985 3445,2750 3445,2540 3425,2520 v1(3420,2520) 3405,2520 3345,2460 3345,2408.5 v1(3342.44,2405.94)
U6_3: R4.1 R9.2 U6.3 | length 172.8
  Top Layer w10: U6.3 3267.56,2468.07 R4.1 R9.2
U7_11: R13.1 U7.11 | length 109
  Top Layer w10: R13.1 2744.4,4150.6 2765,4130 U7.11@2765,4064.5
U7_12: R10.1 U7.12 | length 110
  Top Layer w10: R10.1 2645,4140 2693.1,4091.9 U7.12
U14_1: C9.2 R12.1 R21.2 U1.P3 U14.1 U15.3 | length 1365.5
  Bottom Layer w10: R12.1 R21.2 ; U15.3 3041.93,2727.74 C9.2 3089.52,2630.14 R21.2 ; U14.1@3167.5,2552.5 U14.1 ; U14.1 3162.54,2552.54 3120,2510 3038.41,2510 R21.2 ; U1.P3@3346,2144 U1.P3 3346,2104 3330,2090 3325,2085 3240,2085 3195,2130 3195,2155 3020,2330 3020,2400 3005,2415 2970,2415 2960,2425 2960,2500.6 R21.2
U14_3: R17.2 U1.P4 U14.3 | length 452.6
  Bottom Layer w10: U14.3 3182.05,2475.77 R17.2 ; R17.2 3235,2475.8 3235,2215 3267,2183 U1.P4
U14_4: C9.1 R21.1 R25.1 U14.4 | length 464.3
  Top Layer w10: v1(3115,2480) 3130,2495 v1(3130,2595)
  Bottom Layer w10: R21.1 3065.74,2465.77 U14.4 3079.97,2480 v1(3115,2480) ; R25.1 3070,2376.9 3070,2477.7 U14.4 ; v1(3130,2595) 3168.27,2633.27 C9.1
  other v1: 3130,2595
U15_1: D3.2 D7.1 U15.1 | length 371.1
  Bottom Layer w10: D3.2 D7.1 2818.9,2786.1 2839.9,2765.1 2923.9,2765.1 2961.3,2802.5 U15.1
U15_4: D7.2 R26.1 R27.2 U15.4 | length 260
  Bottom Layer w10: R27.2 2818.89,2645.77 D7.2 2888.48,2713.51 U15.4 2902.71,2656.96 R26.1
U20_1: U20.1 U21.6 | length 400.1
  Top Layer w10: U21.6 3672.6,2307.6 3690,2325 3690,2635 3678.54,2646.46 U20.1
U23_8: R36.2 R38.1 U23.8 U35.1 | length 1003.5
  Top Layer w10: U35.1 2907.91,3835.63 R36.2 R38.1 3020,3880.63 3020,3905 3020,3940 v1(3060,3980) ; v1(3170,3990) 3170,3980 3270,3880 ; U23.8 v1(3350,4030)
  Bottom Layer w10: v1(3060,3980) 3070,3990 v1(3170,3990) 3275,4095 3350,4095 3365,4080 v1(3380,4080) 3350,4050 v1(3350,4030)
U23_9: R31.2 U23.9 | length 77.5
  Top Layer w10: R31.2 3316.22,3949.41 U23.9
U23_11: R34.2 U23.11 | length 248.3
  Top Layer w10: R34.2 3195,3990 3275,3910 U23.11
U23_25: R29.1 U23.25 | length 87.6
  Top Layer w10: U23.25@3540,3910 3585.15,3910 R29.1@3615.16,3879.99
U23_26: R28.1 U23.26 | length 87.8
  Top Layer w10: U23.26@3540,3930 3584.5,3930 R28.1@3615.13,3960.63
USB1_A5: R16.2 USB1.A5 | length 636.3
  Top Layer w10: USB1.A5 3511.5,4581.5 3525,4595 3640,4595 3690,4645 3820,4645 3855,4610 3855,4545.6 R16.2
USB1_B5: R15.1 USB1.B5 | length 384.6
  Top Layer w10: R15.1@3122.3,4492.9 3122.3,4462.2 3194.5,4390 3350,4390 3393.3,4433.4 USB1.B5@3393.3,4468.4
USB_DN: D6.1 U17.P3 U23.5 USB1.A7 USB1.B7 | length 1438.1
  Top Layer w10: D6.1@3345,4140 3365,4140 3425,4080 U23.5@3425,3990.5 ; D6.1@3345,4145 3452.4,4252.4 USB1.A7@3452.4,4470.4 ; D6.1@3345.1,4134.9 D6.1@3345.1,4143 ; USB1.A7 3452.4,4507.4 3465,4520 3480,4520 3491.8,4508.2 USB1.B7 3491.8,4443.2 3520,4415 3840,4415 4051,4626 U17.P3
USB_DP: D5.1 U17.P2 U23.4 USB1.A6 USB1.B6 | length 1694.4
  Top Layer w10: v1(3400,4395) 3432.72,4427.72 USB1.B6 ; U23.4@3445,3990.5 3445,4060 D5.1@3528,4143 ; 3472.1,4427.9 3505,4395 3885,4395 4130,4640 U17.P2 ; USB1.A6 3472.09,4385 v1(3480,4385) 3490,4375 3620,4375 3645,4350 3645,4253 D5.1
  Bottom Layer w10: v1(3400,4395) 3430,4395 3440,4385 v1(3480,4385)
VBAT: BT1.2 C10.1 C11.1 U19.14 | length 2804.8
  Top Layer w10: U19.14 3180,3455 3299.37,3574.37 C11.1 3375,3569.37 C10.1 4054.14,3569.37 4380.95,3242.56 BT1.2@4499.06,3242.56 ; BT1.2@4380.94,3277.56 4380.94,3409.05 4200,3590 4200,4041.49 4380.94,4222.44 BT1.2@4499.06,4222.44
VBUS: C1.1 C2.1 D2.2 D4.1 R36.1 U17.P1 USB1.A4 USB1.A9 | length 2711.5
  Top Layer w10: v1(2905,4050) 2975,3980 R36.1 ; v1@2930,4245 v1(2930,4247) D4.1 3055,4405 2990,4470 2990,4495 3025,4530 3190,4530 3197.3,4522.7 C2.1 ; C2.1@3212.3,4492.9 3212.3,4482.2 3284.5,4410 3340,4410 3367.8,4437.8 USB1.A9 ; USB1.A9 3367.76,4492.76 3405,4530 3455,4580 v1(3480,4580) ; v1(3535,4570) 3535,4520 3556.7,4498.3 USB1.A4 3556.7,4443.3 3569,4431 3656,4431 v1(3665,4440) 3712.25,4487.25 C1.1 ; v1(3860,4320) 4208,4668 U17.P1
  Top Layer w20: C2.1@3212.25,4492.88 3257.25,4537.88 3257.25,4612.25 3223.42,4646.08 D2.2
  Bottom Layer w10: v1(2905,4050) 2905,4222 v1(2930,4247) ; v1(3480,4580) 3525,4580 v1(3535,4570) ; v1(3665,4440) 3740,4440 v1(3860,4320)
VIN: C4.1 CN1.2 D2.1 L1.2 R11.2 R33.2 U3.3 U6.4 U6.5 U11.1 U12.1 U21.3 U27.1 U28.1 U31.1 U32.1 U36.3 U39.1 U40.1 | length 6170.8
  Top Layer w10: L1.2 3233.9,2304.1 U6.4 ; v1(3055,4660) 3067.25,4672.25 D2.1 ; U6.4@3270,2290 U6.5@3344.8,2290 ; C4.1 3480,2360.63 v1(3480,2490) ; U21.3 3759.29,2393.54 U28.1 3818.54,2393.54 3850,2425 3850,2485 3760,2575 v1(3760,2640) ; v1(3800,3380) 3800,3343.62 v1(4040.55,3103.07) 4091.61,3103.07 U39.1 U40.1 ; U27.1 3940,2443.54 3940,2480 3965,2505 4000,2505 4040,2465 v1(4060,2465)
  Top Layer w19.68: U31.1 U32.1@4467.05,2621.9
  Top Layer w19.84: 4473.4,2489.66 4626.91,2489.66 CN1.2
  Top Layer w20: U6.5 3353.94,2315.63 C4.1 ; v1(3480,2490) 3480,2544.37 R33.2 ; U28.1 U27.1 ; v1@4060,2466.46 v1(4060,2585) ; U12.1 4080,2583.54 4130,2583.54 4146.46,2583.54 4181.85,2548.15 U3.3@4192.6,2548.15 ; R11.2 4319.37,2365 v1(4430,2365) 4473.39,2408.4 4473.39,2489.66 4467.05,2496.01 U32.1@4467.05,2621.9
  Bottom Layer w10: v1(3055,4660) 3055,4450 3220,4285 3415,4285 3650,4050 3745,4050 3800,3995 v1(3800,3380) ; v1(4040.55,3103.07) 4015,3077.5 4015,2630 v1(4060,2585)
  Bottom Layer w20: v1(3480,2490) 3630,2640 v1(3760,2640) ; v1(4060,2465) 4180,2365 v1(4430,2365)
pads on no net: SW1.2 SW1.3 SW2.2 SW2.3 U7.5 U7.6 U7.10 U19.1 U19.3 U19.4 U19.5 U19.6 U19.7 U19.8 U19.9 U19.10 U19.11 U19.12 U23.1 U23.2 U23.10 U23.12 U23.13 U23.14 U23.15 U23.16 U23.17 U23.18 U23.19 U23.20 U23.21 U23.22 U23.23 U23.27 U23.29 U30.A1 U30.C2 U30.R2 U36.4 USB1. USB1.1 USB1.A8 USB1.B8

## Polygon pours and split planes (outlines as drawn)
GND on Bottom Layer (solid): 1500,5120 1620,5000 5260,5000 4920,4660 4920,1650 4780,1500 1660,1500 1630,1530 1630,1660
GND on Top Layer (solid): 1655,5160 1705,5110 5205,5110 5215,5100 5215,1730 5095,1610 1595,1610 1555,1570 1515,1570

## Keep-outs
Keep-Out Layer:
  lines w10: 2035,2152.21 ccw(c2153.11,2152.21) 2153.11,2034.1 ; 2035,4671.89 cw(c2153.11,4671.89) 2153.11,4790 ; 4672.79,2034.1 ccw(c4672.79,2152.21) 4790.9,2152.21 ; 4672.79,4790 cw(c4672.79,4671.89) 4790.9,4671.89

## Silkscreen, mask and mechanical layers (free items; w line width, h text height)
Top Overlay:
  text "G" at 3965,4569.84 h19.68 r180
  text "DN" at 4030,4550.16 h19.68
  text "DP" at 4115,4550.16 h19.68
  text "VBUS" at 4205,4550.16 h19.68
Bottom Overlay:
  text "A" at 3510,2950 h20
  text "C" at 3730,2950 h20

## Text inside footprints (layer, text, board x,y; h text height)
CN1: Top Overlay "-" at 4650,2775.32 h39.37; Top Overlay "+" at 4658.92,2353.92 h39.37 r135
U1: Top Overlay "1" at 3495,2094 h20 r180
U7: Top Overlay "ANTENNA" at 2245,3485 h80 r90
U17: Top Overlay "1" at 4200,4624 h20 r180